# Altium PCB CNC.PcbDoc (part 3 of 3)
Units mm, origin at the board's own origin, x right, y up, seen from the top; angles counter-clockwise.
Board outline 148.41 x 98.24 mm, 4 copper layers (Top Layer, Mid-Layer 1, Ground Plane in NEGATIVE, Bottom Layer), stack 0.867 mm thick; 230 components, 218 nets, 997 pads, 307 vias.
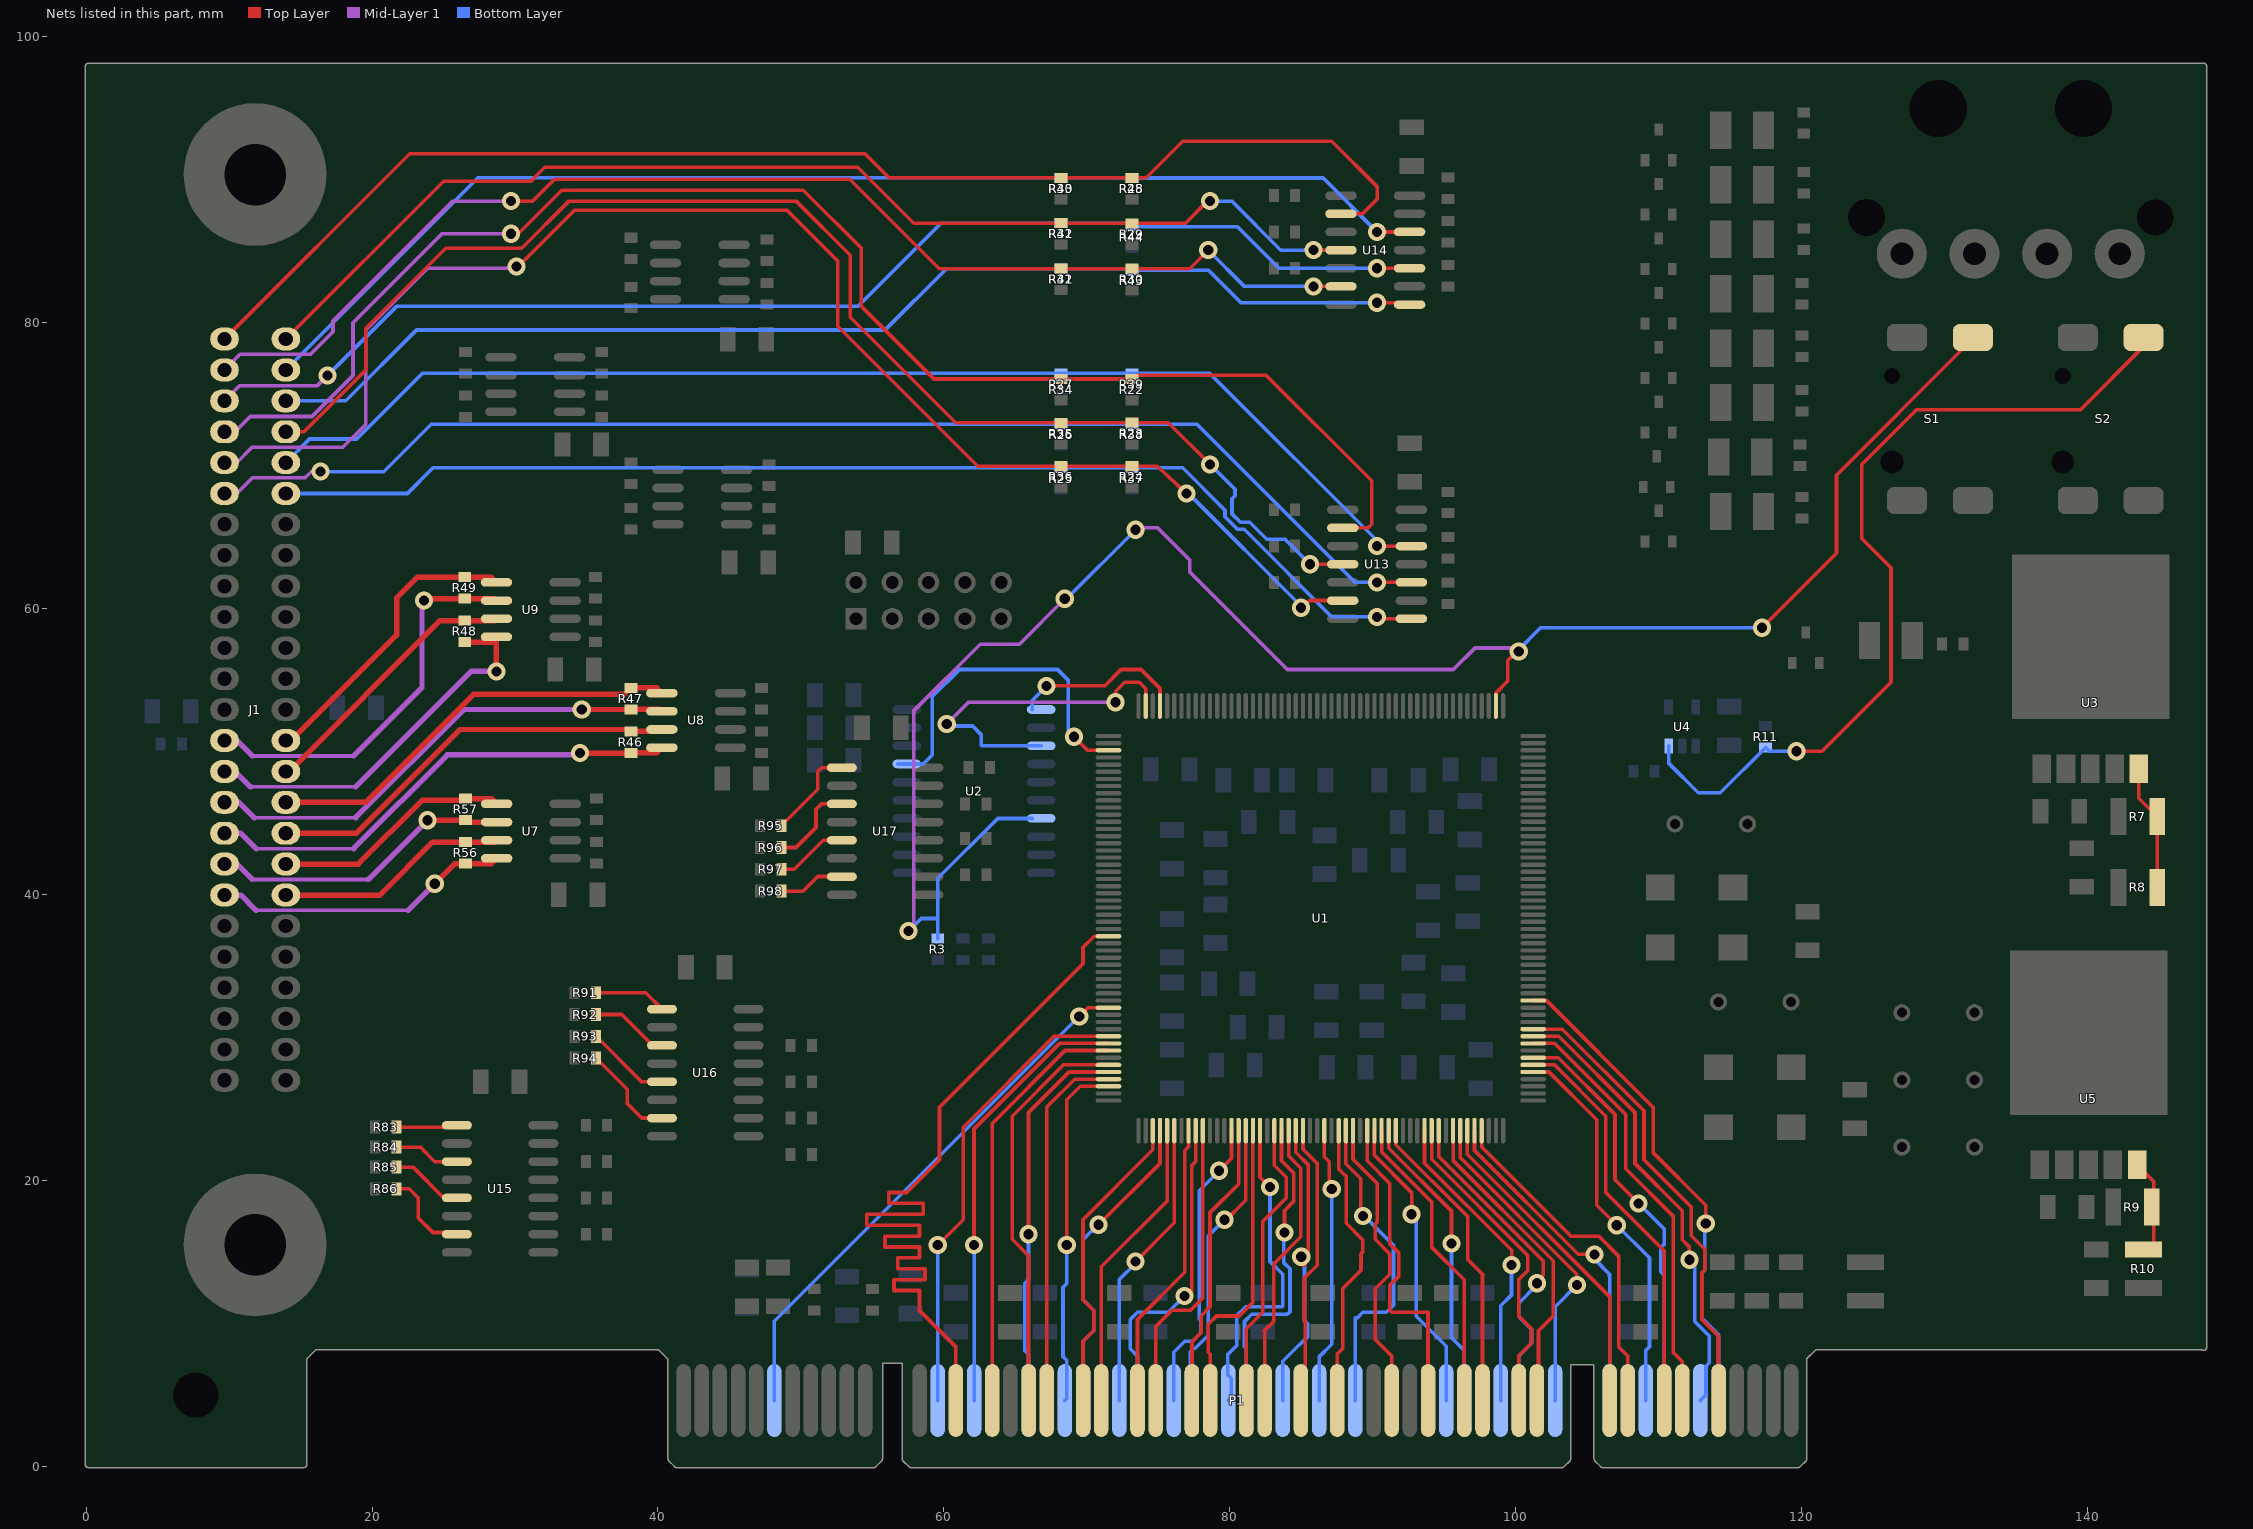
[diagram p5: the nets of this part, all layers, seen from the top]

## Via types
v1: diameter 1.27, hole 0.711, Top Layer to Bottom Layer, 303 vias
v2: diameter 2.032, hole 1.016, Top Layer to Bottom Layer, 3 vias
v3: diameter 1.27, hole 0.711, Top Layer to Bottom Layer, tented top, 1 vias

## Nets (pads, with @x,y where several pads share a name; then routed paths per layer and width w, separated by ;. In a path a pad name is that pad's centre, name@x,y a point inside that pad or via, vN(x,y) a via of type N, cw(c..) or ccw(c..) an arc to the next point about the centre after c; other vN are vias at no path point) (continued)
NetR3_1: R3.1 S1.2 U1.106 U2.7 | length 132.5
  Top Layer w0.254: v1(57.531,37.465) v1@57.531,37.973 ; U1.106@98.61,53.204 98.61,54.115 99.441,54.946 99.441,56.388 100.076,57.023 v1(100.203,57.023) ; v1(117.221,58.674) 122.428,63.881 122.428,69.342 131.303,78.217 S1.2@131.967,78.217
  Mid-Layer 1 w0.254: v1(57.531,37.465) 57.901,37.835 57.901,52.887 62.546,57.531 65.278,57.531 v1(68.453,60.706) ; v1(73.406,65.532) 73.533,65.659 74.952,65.659 77.203,63.408 77.203,62.562 84.012,55.753 95.631,55.753 97.142,57.264 99.962,57.264 v1(100.203,57.023)
  Bottom Layer w0.254: v1(57.531,37.465) 58.408,38.342 59.563,38.342 ; R3.1@59.563,36.945 59.563,38.342 ; U2.7@66.168,45.339 63.754,45.339 59.563,41.148 59.563,38.342 ; v1@68.453,60.579 v1(73.406,65.532) ; v1(100.203,57.023) 100.076,57.023 101.727,58.674 v1(117.221,58.674)
NetR7_2: R7.2 R8.1 U3.SENSE | length 8.8
  Top Layer w0.254: U3.SENSE@143.579,48.801 143.579,46.747 R7.2@144.86,45.466 R8.1@144.86,40.513
NetR9_2: R9.2 R10.1 U5.SENSE | length 6.5
  Top Layer w0.254: U5.SENSE@143.452,21.115 144.606,19.961 144.606,15.527 R10.1@144.272,15.193
NetR11_1: R11.1 S2.2 U4.3 | length 60.4
  Top Layer w0.254: v1(119.634,50.038) 121.412,50.038 126.238,54.864 126.238,62.865 124.206,64.897 124.206,70.104 128.016,73.914 139.474,73.914 143.905,78.345 S2.2@143.905,78.217
  Bottom Layer w0.254: U4.3@110.683,50.419 110.683,49.21 112.763,47.13 114.301,47.13 R11.1@117.475,50.304 117.741,50.038 v1(119.634,50.038)
NetR83_1: R83.1 U15.1 | length 4.3
  Top Layer w0.254: R83.1@21.705,23.749 25.804,23.749 U15.1@25.931,23.876
NetR84_1: R84.1 U15.3 | length 4.6
  Top Layer w0.254: R84.1@21.705,22.352 23.368,22.352 24.384,21.336 U15.3@25.931,21.336
NetR85_1: R85.1 U15.5 | length 5.1
  Top Layer w0.254: R85.1@21.705,20.955 22.86,20.955 25.019,18.796 U15.5@25.931,18.796
NetR86_1: R86.1 U15.7 | length 6.4
  Top Layer w0.254: R86.1@21.705,19.431 22.606,19.431 23.241,18.796 23.241,17.399 24.257,16.383 25.804,16.383 U15.7@25.931,16.256
NetR91_1: R91.1 U16.1 | length 5.1
  Top Layer w0.254: R91.1@35.675,33.147 39.139,33.147 U16.1@40.282,32.004
NetR92_1: R92.1 U16.3 | length 5.5
  Top Layer w0.254: R92.1@35.675,31.623 37.465,31.623 39.624,29.464 U16.3@40.282,29.464
NetR93_1: R93.1 U16.5 | length 5.9
  Top Layer w0.254: R93.1@35.675,30.099 38.85,26.924 U16.5@40.282,26.924
NetR94_1: R94.1 U16.7 | length 6.9
  Top Layer w0.254: R94.1@35.675,28.575 37.846,26.404 37.846,25.4 38.862,24.384 U16.7@40.282,24.384
NetR95_1: R95.1 U17.1 | length 6.6
  Top Layer w0.254: R95.1@48.629,44.831 51.181,47.383 51.181,48.641 51.435,48.895 U17.1@52.855,48.895
NetR96_1: R96.1 U17.3 | length 6.2
  Top Layer w0.254: R96.1@48.629,43.307 49.657,43.307 51.054,44.704 51.054,45.974 51.435,46.355 U17.3@52.855,46.355
NetR97_1: R97.1 U17.5 | length 5.1
  Top Layer w0.254: R97.1@48.629,41.783 49.53,41.783 51.562,43.815 U17.5@52.855,43.815
NetR98_1: R98.1 U17.7 | length 4.6
  Top Layer w0.254: R98.1@48.641,40.259 50.165,40.259 51.181,41.275 U17.7@52.855,41.275
NetU1_153: U1.153 U2.1 | length 12.2
  Top Layer w0.254: v1(67.183,54.61) 71.247,54.61 72.39,55.753 73.787,55.753 75.11,54.43 U1.153@75.11,53.204
  Bottom Layer w0.254: U2.1@66.168,52.959 66.168,53.595 v1(67.183,54.61)
NetU1_155: U1.155 U2.3 | length 24.7
  Top Layer w0.254: v1(72.009,53.467) 72.009,54.229 72.644,54.864 73.66,54.864 74.11,54.414 U1.155@74.11,53.204
  Mid-Layer 1 w0.254: v1(60.198,51.943) 61.722,53.467 v1(72.009,53.467)
  Bottom Layer w0.254: v1(60.198,51.943) 60.198,51.816 60.211,51.803 62.011,51.803 62.598,51.216 62.598,50.472 62.651,50.419 U2.3@66.803,50.419
NetU1_159: U1.159 U2.17 | length 24.3
  Top Layer w0.254: v1(69.088,51.054) 70.038,50.104 U1.159@71.51,50.104
  Bottom Layer w0.254: U2.17@56.768,49.149 U2.17@57.403,49.149 58.547,49.149 59.182,49.784 59.182,53.848 61.087,55.753 67.945,55.753 68.707,54.991 68.707,51.435 v1(69.088,51.054)
OUT1: J1.47 R22.1 R34.2 U13.2 | length 105.6
  Top Layer w0.254: v1(29.718,86.233) 30.226,86.233 33.274,89.281 50.165,89.281 54.229,85.217 54.229,81.153 59.309,76.073 R34.2@68.199,76.073 R22.1@73.152,76.073 73.406,76.327 82.55,76.327 89.916,68.961 89.916,65.913 89.662,65.659 U13.2@87.897,65.659
  Mid-Layer 1 w0.254: J1.47@9.677,72.387 10.411,72.387 11.481,73.457 15.799,73.457 18.669,76.327 18.669,80.01 24.892,86.233 v1(29.718,86.233)
OUT2: J1.4 R23.1 R35.2 U13.4 | length 96.9
  Top Layer w0.254: J1.4@13.97,72.387 15.237,72.387 19.558,76.708 19.558,79.629 25.146,85.217 30.48,85.217 33.782,88.519 49.657,88.519 53.443,84.733 53.443,80.391 60.821,73.013 R35.2@68.199,73.013 68.211,73.025 R23.1@73.152,73.025 75.692,73.025 v1(78.613,70.104) ; v1(85.598,63.119) U13.4@87.897,63.119 U13.4@88.024,63.246
  Bottom Layer w0.254: v1(78.613,70.104) 80.359,68.358 80.359,67.913 80.15,67.704 80.15,66.64 80.737,66.053 81.394,66.053 82.582,64.865 83.852,64.865 v1(85.598,63.119)
OUT3: J1.46 R24.1 R36.2 U13.6 | length 103.8
  Top Layer w0.254: v1(30.099,83.947) 30.226,83.947 34.163,87.884 49.022,87.884 52.578,84.328 52.578,79.756 62.357,69.977 R36.2@68.199,69.977 R24.1@73.152,69.977 74.93,69.977 v1(76.962,68.072) ; v1(84.963,60.071) 85.598,60.579 U13.6@87.897,60.579
  Mid-Layer 1 w0.254: J1.46@9.677,70.227 10.537,70.227 11.608,71.298 17.958,71.298 19.558,72.898 19.558,79.502 23.876,83.82 29.972,83.82 v1(30.099,83.947)
  Bottom Layer w0.254: v1(76.962,68.072) 77.111,68.072 84.963,60.22 v1(84.963,60.071)
OUT4: J1.6 R25.1 R37.2 U13.8 | length 84.1
  Top Layer w0.254: v1(90.297,59.436) 90.424,59.436 90.551,59.309 U13.8@92.697,59.309
  Bottom Layer w0.254: J1.6@13.97,68.067 22.474,68.067 24.269,69.862 R37.2@73.152,69.862 76.696,69.862 79.654,66.904 79.654,66.435 80.532,65.557 81.001,65.557 87.122,59.436 v1(90.297,59.436)
OUT5: J1.45 R26.1 R38.2 U13.10 | length 89.6
  Top Layer w0.254: v1@90.424,61.849 U13.10@92.697,61.849
  Mid-Layer 1 w0.254: J1.45@9.677,68.067 10.536,68.067 11.633,69.164 15.316,69.164 15.748,69.596 v1(16.383,69.596)
  Bottom Layer w0.254: v1(16.383,69.596) 20.828,69.596 24.142,72.91 R26.1@68.199,72.91 R38.2@73.152,72.91 73.164,72.898 77.724,72.898 88.773,61.849 v1(90.297,61.849) v1@90.424,61.849
OUT6: J1.5 R27.1 R39.2 U13.12 | length 86.5
  Top Layer w0.254: v1(90.297,64.389) U13.12@92.697,64.389
  Bottom Layer w0.254: J1.5@13.97,70.227 15.625,71.882 18.923,71.882 23.507,76.466 R27.1@68.199,76.466 R39.2@73.152,76.466 78.601,76.466 v1@90.551,64.516
OUT7: J1.50 R28.1 R40.2 U14.2 | length 92.9
  Top Layer w0.254: J1.50@9.677,78.867 22.631,91.821 54.483,91.821 56.158,90.146 R40.2@68.199,90.146 R28.1@73.152,90.146 74.144,90.146 76.708,92.71 87.122,92.71 90.297,89.535 90.297,88.646 89.281,87.63 U14.2@87.77,87.63
OUT8: J1.1 R29.1 R41.2 U14.4 | length 82.5
  Top Layer w0.254: J1.1@13.97,78.867 25.019,89.916 31.115,89.916 32.083,90.884 53.975,90.884 57.888,86.971 R41.2@68.199,86.971 73.14,86.971 R29.1@73.152,86.959 76.871,86.959 78.431,88.519 v1(78.613,88.519) ; v1(85.852,85.09) U14.4@87.77,85.09
  Bottom Layer w0.254: v1(78.613,88.519) 80.137,88.519 83.566,85.09 v1(85.852,85.09)
OUT9: J1.49 R30.1 R42.2 U14.6 | length 88.2
  Top Layer w0.254: v1(29.718,88.519) 31.242,88.519 32.766,90.043 53.419,90.043 59.666,83.796 R42.2@68.199,83.796 R30.1@73.152,83.796 77.192,83.796 v1(78.486,85.09) ; v1(85.852,82.55) U14.6@87.77,82.55
  Mid-Layer 1 w0.254: J1.49@9.677,76.707 10.771,77.8 15.697,77.8 17.272,79.375 17.272,80.137 25.654,88.519 v1(29.718,88.519)
  Bottom Layer w0.254: v1(78.486,85.09) 81.026,82.55 v1(85.852,82.55)
OUT10: J1.3 R31.1 R43.2 U14.8 | length 83.6
  Top Layer w0.254: v1(90.297,81.407) 92.443,81.407 U14.8@92.57,81.28 U14.8@92.456,81.166
  Bottom Layer w0.254: J1.3@13.97,74.547 18.159,74.547 23.114,79.502 55.88,79.502 60.174,83.796 R31.1@68.199,83.796 73.14,83.796 R43.2@73.152,83.784 ; R43.2@73.152,83.681 78.498,83.681 80.772,81.407 v1(90.297,81.407)
OUT11: J1.48 R32.1 R44.2 U14.10 | length 89.2
  Top Layer w0.254: v1(90.297,83.82) U14.10@92.57,83.82
  Mid-Layer 1 w0.254: J1.48@9.677,74.547 10.746,75.616 16.18,75.616 v1(16.891,76.327)
  Bottom Layer w0.254: v1(16.891,76.327) 21.717,81.153 53.975,81.153 59.793,86.971 R32.1@68.199,86.971 R44.2@73.152,86.971 ; R44.2@73.152,86.729 80.53,86.729 83.439,83.82 v1(90.297,83.82)
OUT12: J1.2 R33.1 R45.2 U14.12 | length 85.7
  Top Layer w0.254: v1(90.297,86.36) U14.12@92.57,86.36
  Bottom Layer w0.254: J1.2@13.97,76.707 27.409,90.146 R33.1@68.199,90.146 73.14,90.146 R45.2@73.152,90.134 86.523,90.134 v1(90.297,86.36)
PCI_AD0: P1.A58 U1.67 | length 34.3
  Top Layer w0.254: U1.67@101.21,32.604 102.143,32.604 109.601,25.146 109.601,21.971 113.284,18.288 v1(113.284,17.018)
  Bottom Layer w0.254: v1(113.284,17.018) 113.284,16.916 113.209,16.992 113.209,13.746 113.017,13.554 113.017,10.365 114.179,9.204 P1.A58@114.179,4.628
PCI_AD1: P1.B58 U1.63 | length 32.7
  Top Layer w0.254: U1.63@101.21,30.604 103.254,30.604 108.966,24.892 108.966,21.463 112.268,18.161 112.268,16.151 113.209,15.21 113.209,13.746 113.017,13.554 113.017,10.274 114.179,9.113 P1.B58@114.179,4.628
PCI_AD2: P1.A57 U1.62 | length 32.4
  Top Layer w0.254: U1.62@101.21,30.104 102.992,30.104 108.331,24.765 108.331,21.209 111.633,17.907 111.633,15.875 112.141,15.367 v1(112.141,14.478) v1@112.522,14.097
  Bottom Layer w0.254: v1(112.141,14.478) 112.522,14.097 112.522,10.16 113.538,9.144 113.538,7.259 113.302,7.023 113.302,5.022 P1.A57@112.909,4.628
PCI_AD3: P1.B56 U1.61 | length 30.2
  Top Layer w0.254: U1.61@101.21,29.604 102.73,29.604 107.696,24.638 107.696,20.828 110.998,17.526 110.998,8.001 111.639,7.36 P1.B56@111.639,4.628
PCI_AD4: P1.A55 U1.59 | length 29
  Top Layer w0.254: U1.59@101.21,28.604 102.968,28.604 106.934,24.638 106.934,20.066 v1(108.585,18.415)
  Bottom Layer w0.254: v1(108.585,18.415) 110.369,16.631 110.369,15.543 110.134,15.309 110.134,13.647 110.369,13.413 P1.A55@110.369,4.628
PCI_AD5: P1.B55 U1.58 | length 28.1
  Top Layer w0.254: U1.58@101.21,28.104 102.706,28.104 106.299,24.511 106.299,19.177 110.369,15.107 P1.B55@110.369,4.628
PCI_AD6: P1.A54 U1.57 | length 27.1
  Top Layer w0.254: U1.57@101.21,27.604 102.317,27.604 105.664,24.257 105.664,18.288 v1(107.061,16.891)
  Bottom Layer w0.254: v1(107.061,16.891) 109.347,14.605 109.347,8.382 109.099,8.134 P1.A54@109.099,4.628
PCI_AD7: P1.B53 U1.49 | length 24.3
  Top Layer w0.254: U1.49@97.61,23.504 97.61,22.354 103.835,16.129 105.791,16.129 107.188,14.732 107.188,8.382 107.829,7.741 P1.B53@107.829,4.628
PCI_AD8: P1.B52 U1.47 | length 23
  Top Layer w0.254: U1.47@96.61,23.504 96.61,21.856 106.559,11.907 P1.B52@106.559,4.628
PCI_AD9: P1.A49 U1.46 | length 22.9
  Top Layer w0.254: U1.46@96.11,23.504 96.11,21.619 104.267,13.462 v1(104.267,12.7)
  Bottom Layer w0.254: P1.A49@102.749,4.628 102.749,11.182 v1(104.267,12.7)
PCI_AD10: P1.B48 U1.45 | length 22.2
  Top Layer w0.254: U1.45@95.61,23.504 95.61,21.408 102.616,14.402 102.616,10.541 101.587,9.512 101.587,4.737 P1.B48@101.479,4.628
PCI_AD11: P1.A47 U1.43 | length 24.1
  Top Layer w0.254: U1.43@94.61,23.504 94.61,21.697 101.918,14.389 101.918,13.399 101.219,12.7 101.346,12.573 101.473,12.7 v1(101.473,12.827)
  Bottom Layer w0.254: P1.A47@100.209,4.628 100.209,7.741 100.203,7.747 101.092,8.636 101.092,9.62 100.203,10.509 100.203,11.43 101.473,12.7 v1(101.473,12.827)
PCI_AD12: P1.B47 U1.42 | length 22.7
  Top Layer w0.254: U1.42@94.11,23.504 94.11,21.496 100.838,14.768 100.838,13.716 100.209,13.087 100.209,10.535 101.092,9.652 101.092,8.636 100.209,7.753 P1.B47@100.209,4.628
PCI_AD13: P1.A46 U1.41 | length 21.7
  Top Layer w0.254: U1.41@93.61,23.504 93.61,21.223 99.706,15.127 99.706,14.108 v1(99.695,14.097)
  Bottom Layer w0.254: P1.A46@98.939,4.628 98.939,11.258 99.695,12.014 v1(99.695,14.097)
PCI_AD14: P1.B45 U1.37 | length 21.4
  Top Layer w0.254: U1.37@91.61,23.504 91.61,22.523 96.647,17.486 96.647,14.478 97.669,13.456 P1.B45@97.669,4.628
PCI_AD15: P1.A44 U1.36 | length 21.1
  Top Layer w0.254: U1.36@91.11,23.504 91.11,22.276 95.504,17.882 v1(95.504,15.621)
  Bottom Layer w0.254: v1(95.504,15.621) 95.504,9.017 96.399,8.122 P1.A44@96.399,4.628
PCI_AD16: P1.A32 U1.21 | length 22.5
  Top Layer w0.254: U1.21@83.61,23.504 83.61,21.394 84.455,20.549 84.455,18.542 83.82,17.907 v1(83.82,16.383)
  Bottom Layer w0.254: P1.A32@81.159,4.628 81.153,4.634 81.153,8.255 81.026,8.382 81.026,10.16 81.534,10.668 84.023,10.668 84.201,10.846 84.201,13.843 83.757,14.287 83.757,16.319 v1(83.82,16.383)
PCI_AD17: P1.B32 U1.20 | length 20.4
  Top Layer w0.254: P1.B32@81.159,4.628 81.153,4.634 81.153,9.652 82.296,10.795 82.296,17.145 83.947,18.796 83.947,20.244 83.11,21.081 U1.20@83.11,23.504
PCI_AD18: P1.A31 U1.18 | length 22.8
  Top Layer w0.254: U1.18@82.11,23.504 82.11,20.252 v1(82.804,19.558)
  Bottom Layer w0.254: P1.A31@79.889,4.628 80.086,4.826 80.086,6.179 79.858,6.407 79.858,7.849 80.467,8.458 80.467,10.541 81.102,11.176 83.642,11.176 83.693,11.227 83.693,13.462 82.804,14.351 v1(82.804,19.558)
PCI_AD19: P1.B30 U1.17 | length 21.2
  Top Layer w0.254: P1.B30@78.619,4.628 78.619,7.868 78.486,8.001 78.486,9.969 79.058,10.541 80.645,10.541 81.61,11.506 U1.17@81.61,23.504
PCI_AD20: P1.A29 U1.16 | length 20.8
  Top Layer w0.254: v1(79.629,17.272) 79.629,17.145 81.11,18.626 U1.16@81.11,23.504
  Bottom Layer w0.254: P1.A29@77.349,4.628 77.216,4.761 77.216,8.001 77.495,8.28 77.583,8.28 78.486,9.184 78.486,16.129 v1(79.629,17.272)
PCI_AD21: P1.B29 U1.15 | length 20.2
  Top Layer w0.254: P1.B29@77.349,4.628 77.349,8.747 77.991,9.389 77.991,10.554 78.613,11.176 78.613,17.78 80.61,19.777 U1.15@80.61,23.504
PCI_AD22: P1.A28 U1.14 | length 21
  Top Layer w0.254: v1(79.248,20.701) 80.11,21.563 U1.14@80.11,23.504
  Bottom Layer w0.254: P1.A28@76.079,4.628 76.079,7.995 76.073,8.001 76.848,8.776 77.378,8.776 77.965,9.363 77.965,10.195 77.851,10.309 77.851,19.304 v1(79.248,20.701)
PCI_AD23: P1.B27 U1.10 | length 21
  Top Layer w0.254: P1.B27@74.809,4.628 74.803,4.634 74.803,9.779 75.959,10.935 77.251,10.935 78.11,11.794 U1.10@78.11,23.504
PCI_AD24: P1.A25 U1.6 | length 20.5
  Top Layer w0.254: v1(73.406,14.351) 76.11,17.055 U1.6@76.11,23.504
  Bottom Layer w0.254: P1.A25@72.269,4.628 72.269,13.087 73.406,14.224 v1(73.406,14.351)
PCI_AD25: P1.B24 U1.5 | length 20.8
  Top Layer w0.254: P1.B24@70.999,4.628 70.999,13.976 75.61,18.587 U1.5@75.61,23.504
PCI_AD26: P1.A23 U1.4 | length 22
  Top Layer w0.254: v1(70.815,16.916) 75.11,21.211 U1.4@75.11,23.504
  Bottom Layer w0.254: P1.A23@69.729,4.628 69.729,8.769 70.472,9.512 70.472,10.935 69.729,11.678 69.729,15.881 70.307,16.459 70.79,16.459 70.815,16.485 v1(70.815,16.916)
PCI_AD27: P1.B23 U1.3 | length 21.5
  Top Layer w0.254: 69.723,17.272 74.61,22.159 U1.3@74.61,23.504 ; P1.B23@69.729,4.628 69.729,8.769 70.485,9.525 70.485,10.922 69.729,11.678 69.729,17.266
PCI_AD28: P1.A22 U1.206 | length 24.6
  Top Layer w0.254: v1(68.585,15.499) 68.585,25.659 69.53,26.604 U1.206@71.51,26.604
  Bottom Layer w0.254: P1.A22@68.459,4.628 68.585,4.755 68.585,7.441 68.326,7.7 68.326,12.554 68.585,12.813 v1(68.585,15.499)
PCI_AD29: P1.B21 U1.205 | length 25.7
  Top Layer w0.254: P1.B21@67.189,4.628 67.189,25.152 69.141,27.104 U1.205@71.51,27.104
PCI_AD30: P1.A20 U1.204 | length 27.1
  Top Layer w0.254: v1(65.913,16.256) 65.913,24.765 68.752,27.604 U1.204@71.51,27.604
  Bottom Layer w0.254: v1(65.913,16.256) 65.913,15.494 65.919,15.488 65.919,13.087 65.659,12.827 65.659,8.128 65.919,7.868 P1.A20@65.919,4.628
PCI_AD31: P1.B20 U1.203 | length 28.6
  Top Layer w0.254: P1.B20@65.919,4.628 65.919,14.748 64.77,15.897 64.77,24.511 68.363,28.104 U1.203@71.51,28.104
PCI_CBE0: P1.A52 U1.48 | length 23.5
  Top Layer w0.254: U1.48@97.11,23.504 97.11,22.118 104.369,14.859 105.537,14.859 v1(105.512,14.834)
  Bottom Layer w0.254: v1(105.512,14.834) 105.537,14.859 105.537,14.484 106.553,13.468 106.553,13.335 106.559,13.329 P1.A52@106.559,4.628
PCI_CBE1: P1.B44 U1.35 | length 21.3
  Top Layer w0.254: U1.35@90.61,23.504 90.61,22.03 94.107,18.533 94.107,15.367 96.399,13.075 P1.B44@96.399,4.628
PCI_CBE2: P1.B33 U1.22 | length 20.3
  Top Layer w0.254: P1.B33@82.429,4.628 82.429,9.519 82.423,9.525 83.058,10.16 83.058,14.17 84.963,16.075 84.963,20.879 84.11,21.732 U1.22@84.11,23.504
PCI_CBE3: P1.B26 U1.8 | length 20.4
  Top Layer w0.254: P1.B26@73.539,4.628 73.539,10.293 76.835,13.589 76.835,22.098 77.11,22.373 U1.8@77.11,23.504
PCI_CLK: P1.B16 U1.185 | length 63.5
  Top Layer w0.254: P1.B16@60.839,4.628 60.839,8.376 58.293,10.922 58.293,12.319 56.506,12.319 56.506,13.081 58.674,13.081 58.674,13.843 56.769,13.843 56.769,14.605 58.293,14.605 58.293,15.367 55.88,15.367 55.88,16.129 58.293,16.129 58.293,16.891 54.61,16.891 54.61,17.653 58.547,17.653 58.547,18.415 56.134,18.415 56.134,19.177 57.404,19.177 59.69,21.463 59.69,25.146 69.723,35.179 69.723,36.322 70.505,37.104 U1.185@71.51,37.104
PCI_DEVSEL: P1.B37 U1.29 | length 20.3
  Top Layer w0.254: P1.B37@87.509,4.628 87.509,7.88 87.884,8.255 87.884,12.446 89.167,13.729 89.167,14.894 89.281,15.008 89.281,15.875 88.138,17.018 88.138,20.32 88.006,20.427 87.742,20.691 87.61,20.848 U1.29@87.61,23.504
PCI_FRAME: P1.A34 U1.23 | length 22
  Top Layer w0.254: U1.23@84.61,23.504 84.61,21.994 85.471,21.133 85.471,14.732 85.09,14.351 85.09,14.783 85.039,14.783 84.988,14.732 v1(84.988,14.681) ; v1@85.09,14.097 v1@85.217,14.097
  Bottom Layer w0.254: P1.A34@83.699,4.628 83.693,4.634 83.693,7.366 84.849,8.522 84.871,8.522 85.458,9.109 85.458,9.941 85.217,10.182 85.217,14.961 84.988,14.732 v1(84.988,14.681)
PCI_GNT: P1.A17 U1.200 | length 30.9
  Top Layer w0.254: v1(62.103,15.494) 62.103,23.622 68.085,29.604 U1.200@71.51,29.604
  Bottom Layer w0.254: v1(62.103,15.494) 62.109,15.488 P1.A17@62.109,4.628
PCI_IDSEL: P1.A26 U1.9 | length 22.3
  Top Layer w0.254: v1@76.968,11.805 77.343,12.179 77.343,21.082 77.61,21.349 U1.9@77.61,23.504
  Bottom Layer w0.254: P1.A26@73.539,4.628 73.539,7.741 73.025,8.255 73.025,10.287 73.533,10.795 75.692,10.795 v1(76.835,11.938)
PCI_INTA: P1.A6 U1.195 | length 38
  Top Layer w0.254: v1(69.469,31.496) 70.077,32.104 U1.195@71.51,32.104
  Bottom Layer w0.254: P1.A6@48.139,4.628 48.139,10.166 v1(69.469,31.496)
PCI_IRDY: P1.B35 U1.24 | length 19.8
  Top Layer w0.254: P1.B35@84.969,4.628 85.269,4.928 85.269,10.13 85.217,10.182 85.217,13.208 86.106,14.097 86.106,21.209 85.11,22.205 U1.24@85.11,23.504
PCI_PAR: P1.A43 U1.34 | length 21.5
  Top Layer w0.254: U1.34@90.11,23.504 90.11,21.777 92.71,19.177 v1(92.71,17.653)
  Bottom Layer w0.254: v1@92.71,18.161 v1(92.71,17.653) 93.04,17.323 93.04,10.516 95.129,8.427 P1.A43@95.129,4.628
PCI_PERR: P1.B40 U1.31 | length 21
  Top Layer w0.254: U1.31@88.61,23.504 88.61,21.499 90.31,19.799 90.31,17.11 90.17,16.971 90.17,15.897 91.186,14.881 91.186,13.462 90.17,12.446 90.17,8.89 91.313,7.747 91.313,4.634 P1.B40@91.319,4.628
PCI_REQ: P1.B18 U1.201 | length 29.6
  Top Layer w0.254: P1.B18@63.379,4.628 63.379,24.009 68.474,29.104 U1.201@71.51,29.104
PCI_RST: P1.A15 U1.199 | length 32.7
  Top Layer w0.254: v1(59.563,15.494) 61.341,17.272 61.341,23.749 67.696,30.104 U1.199@71.51,30.104
  Bottom Layer w0.254: v1(59.563,15.494) 59.563,4.634 P1.A15@59.569,4.628
PCI_SERR: P1.B42 U1.33 | length 22.6
  Top Layer w0.254: U1.33@89.61,23.504 89.61,21.388 91.186,19.812 91.186,15.581 91.821,14.946 91.821,13.335 91.186,12.7 91.186,10.922 91.313,10.795 93.853,10.795 93.853,10.541 93.859,10.535 P1.B42@93.859,4.628
PCI_STOP: P1.A38 U1.30 | length 22.6
  Top Layer w0.254: U1.30@88.11,23.504 88.11,21.186 89.154,20.142 89.154,17.678 v1(89.306,17.526)
  Bottom Layer w0.254: P1.A38@88.779,4.628 88.779,7.868 88.76,7.887 88.76,10.401 88.786,10.427 88.935,10.427 89.303,10.795 90.932,10.795 91.44,11.303 91.44,15.494 89.306,17.628 v1(89.306,17.526)
PCI_TRDY: P1.A36 U1.27 | length 19.7
  Top Layer w0.254: U1.27@86.61,23.504 86.61,21.67 86.944,21.336 86.944,19.609 v1(87.122,19.431)
  Bottom Layer w0.254: P1.A36@86.239,4.628 86.239,7.669 87.122,8.553 v1(87.122,19.431) v1@87.122,19.685
XD_N: J1.19 R56.2 U7.7 | length 16.3
  Top Layer w0.381: J1.19@13.97,39.98 20.549,39.98 24.245,43.676 R56.2@26.543,43.676 28.576,43.676 U7.7@28.715,43.815
XD_P: J1.32 R56.1 U7.8 | length 21
  Top Layer w0.381: v1(24.384,40.767) 25.793,42.176 R56.1@26.543,42.176 28.346,42.176 U7.8@28.715,42.545
  Mid-Layer 1 w0.254: 11.887,38.913 22.53,38.913
  Mid-Layer 1 w0.381: J1.32@9.677,39.98 10.82,39.98 11.887,38.913 ; 22.53,38.913 v1(24.384,40.767)
XP_N: J1.18 R57.2 U7.5 | length 16.8
  Top Layer w0.381: J1.18@13.97,42.147 19.033,42.147 23.495,46.609 26.428,46.609 R57.2@26.543,46.724 28.346,46.724 U7.5@28.715,46.355
XP_P: J1.33 R57.1 U7.6 | length 21.3
  Top Layer w0.381: v1(23.876,45.212) 23.888,45.224 R57.1@26.543,45.224 26.682,45.085 U7.6@28.715,45.085
  Mid-Layer 1 w0.254: 11.633,41.072 19.736,41.072
  Mid-Layer 1 w0.381: J1.33@9.677,42.147 10.558,42.147 11.633,41.072 ; 19.736,41.072 v1(23.876,45.212)
YD_N: J1.17 R46.2 U8.7 | length 29.4
  Top Layer w0.381: J1.17@13.97,44.307 18.907,44.307 26.162,51.562 37.961,51.562 R46.2@38.1,51.423 40.133,51.423 U8.7@40.272,51.562
YD_P: J1.34 R46.1 U8.8 | length 34
  Top Layer w0.381: v1(34.544,49.911) 38.088,49.911 R46.1@38.1,49.923 39.903,49.923 U8.8@40.272,50.292
  Mid-Layer 1 w0.254: 11.887,43.231 18.72,43.231
  Mid-Layer 1 w0.381: J1.34@9.677,44.307 10.811,44.307 11.887,43.231 ; 18.72,43.231 25.273,49.784 34.417,49.784 v1(34.544,49.911)
YP_N: J1.16 R47.2 U8.5 | length 29.8
  Top Layer w0.381: J1.16@13.97,46.467 19.543,46.467 27.114,54.038 37.667,54.038 R47.2@38.1,54.471 39.903,54.471 U8.5@40.272,54.102
YP_P: J1.35 R47.1 U8.6 | length 34.2
  Top Layer w0.381: v1(34.671,52.959) 38.088,52.959 R47.1@38.1,52.971 40.133,52.971 U8.6@40.272,52.832
  Mid-Layer 1 w0.254: 11.76,45.39 18.847,45.39
  Mid-Layer 1 w0.381: J1.35@9.677,46.467 10.683,46.467 11.76,45.39 ; 18.847,45.39 26.416,52.959 v1(34.671,52.959)
ZD_N: J1.15 R48.2 U9.7 | length 19.2
  Top Layer w0.381: J1.15@13.97,48.627 14.21,48.627 24.765,59.182 26.471,59.182 R48.2@26.483,59.17 28.563,59.17 U9.7@28.702,59.309
ZD_P: J1.36 R48.1 U9.8 | length 27.6
  Top Layer w0.381: R48.1@26.483,57.67 28.333,57.67 U9.8@28.702,58.039 v1(28.702,55.626)
  Mid-Layer 1 w0.254: 11.506,47.549 18.847,47.549
  Mid-Layer 1 w0.381: J1.36@9.677,48.627 10.428,48.627 11.506,47.549 ; 18.847,47.549 26.924,55.626 v1(28.702,55.626)
ZP_N: J1.14 R49.2 U9.5 | length 21.1
  Top Layer w0.381: J1.14@13.97,50.787 14.338,50.787 21.717,58.166 21.717,60.772 23.163,62.218 R49.2@26.483,62.218 28.333,62.218 U9.5@28.702,61.849
ZP_P: J1.37 R49.1 U9.6 | length 27.6
  Top Layer w0.381: v1(23.622,60.579) 23.761,60.718 R49.1@26.483,60.718 28.563,60.718 U9.6@28.702,60.579
  Mid-Layer 1 w0.254: 11.633,49.708 18.72,49.708
  Mid-Layer 1 w0.381: J1.37@9.677,50.787 10.554,50.787 11.633,49.708 ; 18.72,49.708 23.495,54.483 23.495,60.452 v1(23.622,60.579)
pads on no net: J2.0 J2.1 P1.A1 P1.A2 P1.A3 P1.A7 P1.A9 P1.A11 P1.A14 P1.A19 P1.A40 P1.A41 P1.A60 P1.B1 P1.B2 P1.B7 P1.B8 P1.B10 P1.B14 P1.B39 P1.B60 S1. S1.1 S2. S2.1 U1.7 U1.44 U1.55 U1.56 U1.60 U1.68 U1.69 U1.70 U1.71 U1.73 U1.74 U1.75 U1.81 U1.82 U1.83 U1.84 U1.99 U1.101 U1.108 U1.110 U1.112 U1.114 U1.120 U1.122 U1.125 U1.127 U1.132 U1.133 U1.134 U1.135 U1.136 U1.139 U1.141 U1.146 U1.148 U1.150 U1.152 U1.154 U1.182 U1.187 U1.188 U1.189 U1.191 U1.192 U1.193 U1.194 U1.202 U2.2 U2.9 U2.12 U2.13 U2.14 U2.15 U2.16 U4.4

## Polygon pours and split planes (outlines as drawn)
5V on Top Layer "Mid-Layer 1-No Net" (solid, pour order 31): 45.339,11.049 45.466,11.176 49.149,11.176 49.149,9.779 48.895,9.398 48.895,7.493 46.355,7.493 45.339,8.509
GND on Top Layer "Mid-Layer 1-No Net" (solid, pour order 37): 131.445,25.654 131.445,21.59 131.572,21.463 131.699,21.336 132.08,21.336 133.35,21.336 133.477,21.463 134.239,22.225 134.239,24.003 135.255,25.019 135.255,25.654
GND on Top Layer "Mid-Layer 1-No Net" (solid, pour order 36): 145.923,38.227 139.446,38.227 138.557,37.338 138.557,36.576 138.176,36.195 138.176,36.068 132.461,36.068 131.445,35.052 131.445,25.654 132.842,24.257 145.923,24.257
5V on Top Layer "Mid-Layer 1-No Net" (solid, pour order 32): 139.192,49.911 139.192,46.863 138.811,46.863 137.922,45.974 137.922,43.688 135.636,43.688 131.064,39.116 131.064,18.923 133.604,18.923 128.27,13.589 128.27,44.831 133.604,49.911
3V3 on Top Layer "Mid-Layer 1-No Net" (solid, pour order 29): 141.224,49.784 141.224,45.466 140.081,44.323 138.938,44.323 138.176,43.688 136.017,43.688 132.842,40.513 132.842,36.576 137.795,36.576 138.049,36.83 138.049,41.148 138.684,41.783 140.589,41.783 141.097,42.291 141.097,43.307 141.986,44.196 143.002,44.196 143.002,46.863 142.494,47.371 142.494,49.784
2V5 on Top Layer "Mid-Layer 1-No Net" (solid, remove dead copper, pour order 26): 141.097,22.098 141.097,17.145 137.795,17.145 135.89,15.367 135.89,9.906 136.017,10.033 139.192,10.033 139.192,13.335 139.827,13.97 141.732,13.97 142.494,14.732 142.494,20.066 142.367,20.193 142.367,22.098
5V on Top Layer "Mid-Layer 1-No Net" (solid, pour order 25): 117.475,7.366 117.475,7.874 115.951,9.398 115.951,12.319 126.238,12.319 126.365,12.192 135.255,21.082 135.255,22.987 135.382,23.114 139.446,23.114 139.446,18.796 135.636,14.986 135.636,11.994 133.477,9.835 120.021,9.835 120.015,8.001 119.761,7.366
GND on Top Layer "Mid-Layer 1-No Net" (solid, pour order 33): 145.923,68.834 125.349,68.834 125.349,64.643 128.397,61.595 131.826,61.595 131.826,61.468 132.588,60.706 132.588,51.943 133.35,51.181 145.923,51.181
GND on Top Layer "Mid-Layer 1-No Net" (solid, remove dead copper, pour order 53): 93.472,13.716 92.456,12.7 92.583,12.573 92.583,11.938 95.504,11.938 95.504,13.081 94.742,13.843
5V on Bottom Layer "Mid-Layer 1-No Net" (solid, remove dead copper, pour order 48): 22.631,49.759 22.581,49.759 20.676,51.664 19.406,51.664 18.542,52.451 18.542,53.797 15.545,53.797 15.113,53.365 15.113,52.349 15.443,52.349 17.043,50.749 17.043,47.193 18.669,45.212
3V3 on Bottom Layer "Mid-Layer 1-No Net" (solid, remove dead copper, pour order 35): 72.39,52.832 72.519,52.698 99.949,52.698 99.949,24.13 99.82,24.264 72.39,24.264
3V3 on Bottom Layer "Mid-Layer 1-No Net" (solid, pour order 30): 132.842,40.513 132.842,36.576 137.795,36.576 137.922,36.703 138.049,36.83 138.049,40.513
5V on Bottom Layer "Mid-Layer 1-No Net" (solid, pour order 28): 116.586,11.049 119.634,11.049 119.634,7.493 117.602,7.493 116.586,8.509 116.586,9.017
5V on Bottom Layer "Mid-Layer 1-No Net" (solid, remove dead copper, pour order 41): 50.8,12.827 49.149,10.668 49.149,8.255 49.911,7.493 51.181,7.493 51.562,7.874 53.848,9.906 58.928,9.906 58.928,12.827
GND on Bottom Layer "Mid-Layer 1-No Net" (solid, remove dead copper, pour order 51): 52.324,12.7 58.852,12.7 58.928,12.624 58.928,14.097 58.928,14.224 57.023,16.129 53.848,16.129 53.594,16.129 52.07,14.605 52.07,12.7
5V on Bottom Layer "Mid-Layer 1-No Net" (solid, remove dead copper, pour order 39): 47.752,7.493 46.228,7.493 43.815,9.906 18.669,9.906 18.669,45.847 27.432,54.61 27.432,67.183 29.464,69.215 51.054,69.215 51.054,62.611 46.355,57.912 46.355,44.958 28.321,26.924 28.321,15.748 29.083,14.986 47.752,14.986
3V3 on Bottom Layer "Mid-Layer 1-No Net" (solid, remove dead copper, pour order 43): 74.041,44.069 74.168,45.212 69.85,45.212 68.199,43.561 68.199,41.148 66.04,41.148 63.627,38.862 63.627,38.1 58.42,38.1 58.42,35.306 55.245,35.306 55.245,50.038 58.547,50.038 58.547,53.34 55.372,53.34 55.372,55.499 54.483,56.388 52.832,56.388 52.832,56.261 52.07,55.499 52.07,48.641 29.591,26.162 29.591,20.193 54.864,20.193 54.864,24.384 68.834,38.227 73.914,38.227
3V3 on Bottom Layer "Mid-Layer 1-No Net" (solid, remove dead copper, pour order 47): 138.938,41.783 128.651,41.783 127.635,42.672 126.492,43.815 126.466,66.929 124.349,69.088 123.85,69.596 123.825,94.742 123.571,94.996 121.982,94.996 121.235,94.234 121.285,93.472 121.285,69.596 118.618,66.929 115.256,63.627 114.26,62.611 114.26,57.912 106.164,57.912 99.439,51.054 99.314,50.927 99.314,24.765 122.356,24.765 123.477,25.908 123.601,26.035 123.601,31.496 123.85,31.496 127.089,34.798 128.708,36.449 138.938,36.449
2V5 on Mid-Layer 1 "Mid-Layer 1-No Net" (solid, pour order 38): 139.827,9.906 139.827,15.621 138.811,15.621 106.426,48.006 106.324,50.114 104.369,51.943 97.511,51.943 94.996,48.006 94.996,28.321 95.123,28.194 99.898,24.816 120.066,24.892 135.001,9.906
5V on Mid-Layer 1 "Mid-Layer 1-No Net" (solid, remove dead copper, pour order 44): 44.45,77.724 43.434,78.74 43.434,79.121 41.529,79.121 39.243,76.835 39.243,71.501 38.354,70.612 35.941,70.612 33.782,72.771 30.988,72.771 30.226,72.009 30.226,70.485 32.385,68.326 35.179,68.326 41.91,61.595 46.355,61.595 46.863,62.103 46.863,75.438
2V5 on Mid-Layer 1 "Mid-Layer 1-No Net" (solid, remove dead copper, pour order 46): 88.265,48.006 88.265,48.133 70.993,65.405 56.388,65.405 55.118,64.008 55.118,60.833 57.404,60.833 58.039,61.468 59.944,63.627 67.564,63.627 76.2,54.991 76.2,48.133
5V on Mid-Layer 1 "Mid-Layer 1-No Net" (solid, remove dead copper, pour order 40): 45.339,11.303 51.435,11.303 51.562,11.43 51.562,7.493 45.339,7.493
2V5 on Mid-Layer 1 "Top Layer-No Net" (solid, remove dead copper, pour order 34): 76.2,48.133 76.2,28.194 96.52,28.194 96.266,28.448 96.266,48.133
5V on Mid-Layer 1 "Mid-Layer 1-No Net" (solid, remove dead copper, pour order 42): 139.573,89.535 146.304,89.535 146.304,54.61 132.334,40.767 128.905,40.767 123.825,45.847 123.825,65.405 139.7,81.28
5V on Mid-Layer 1 "Mid-Layer 1-No Net" (solid, remove dead copper, pour order 45): 46.482,75.565 50.673,75.565 56.642,81.534 56.642,90.805 62.484,96.647 146.431,96.647 146.431,86.487 123.825,45.847 111.506,58.166 82.423,58.166 80.772,59.817 74.676,66.04 45.72,66.04
GND on Ground Plane in NEGATIVE (split plane): 147.572,8.948 120.99,8.948 120.87,8.939 120.753,8.911 120.675,8.879 120.643,8.865 120.54,8.802 120.449,8.725 119.811,8.086 119.733,7.995 119.67,7.893 119.657,7.86 119.624,7.782 119.596,7.665 119.587,7.546 119.587,2.159 106.23,2.159 106.23,7.117 106.221,7.237 106.193,7.353 106.147,7.464 106.084,7.567 106.007,7.658 105.915,7.736 105.813,7.798 105.702,7.844 105.586,7.872 105.466,7.882 103.841,7.882 103.722,7.872 103.605,7.844 103.494,7.798 103.392,7.736 103.301,7.658 103.223,7.567 103.16,7.464 103.114,7.353 103.086,7.237 103.077,7.117 103.077,2.159 57.843,2.159 57.843,7.244 57.834,7.364 57.806,7.48 57.76,7.591 57.697,7.694 57.62,7.785 57.528,7.863 57.426,7.925 57.315,7.971 57.199,7.999 57.079,8.009 55.708,8.009 55.589,7.999 55.472,7.971 55.361,7.925 55.259,7.863 55.168,7.785 55.09,7.694 55.027,7.591 54.981,7.48 54.953,7.364 54.944,7.244 54.944,2.159 41.46,2.159 41.46,7.52 41.451,7.64 41.423,7.756 41.391,7.835 41.377,7.867 41.314,7.97 41.237,8.061 40.573,8.725 40.482,8.802 40.379,8.865 40.347,8.879 40.268,8.911 40.152,8.939 40.032,8.948 16.088,8.948 15.968,8.939 15.851,8.911 15.773,8.879 15.741,8.865 15.638,8.802 15.547,8.725 14.909,8.086 14.831,7.995 14.768,7.893 14.755,7.86 14.722,7.782 14.694,7.665 14.685,7.546 14.685,0.693 0.693,0.693 0.693,97.407 147.572,97.407

## Keep-outs
Keep-Out Layer:
  lines w0.203: 120.021,1.326 105.67,1.326 105.67,9.2 103.638,9.2 103.638,1.326 57.283,1.326 57.283,9.2 55.378,9.2 55.378,1.326 40.9,1.326 40.9,9.835 1.784,9.835 1.784,96.647 146.431,96.647 146.431,9.835 120.021,9.835 ; 120.148,1.326 120.148,9.835

## Other copper
Bottom Layer:
  pour cut-out: 110.137,53.885 110.353,54.102 116.332,54.102 116.332,52.248 117.145,51.435 120.142,51.435 120.777,50.8 120.777,49.149 118.999,49.149 117.094,47.244 110.871,47.244 109.855,48.26 109.601,48.006 108.331,48.006 108.331,51.308 108.966,51.943 110.109,51.943
Ground Plane in NEGATIVE (plane layer: these items are gaps in the copper):
  rectangle: 39.37,-1.143 121.031,2.159

## Silkscreen, mask and mechanical layers (free items; w line width, h text height)
Top Overlay:
  rectangle: 37.592,91.44 56.642,96.52
  text "2014 VKOREHOV" at 18.034,94.869 h0.81
  text "S/N" at 34.671,93.599 h0.81
  text "ASSY NO.: 201404" at 17.78,93.218 h0.81
Top Solder:
  rectangle: 40.513,-0.254 120.65,7.366
Bottom Solder:
  rectangle: 40.513,-0.254 120.65,7.366
Board Cut:
  lines w0.508: 40.138,8.438 40.95,7.626 40.95,0.564 41.331,0.183 55.073,0.183 55.454,0.564 55.454,7.499 57.333,7.499 57.333,0.564 57.714,0.183 103.206,0.183 103.587,0.564 103.587,7.372 105.72,7.372 105.72,0.564 106.101,0.183 119.716,0.183 120.097,0.564 120.097,7.651 120.828,8.382 148.082,8.382 148.082,97.917 0.183,97.917 0.183,0.183 15.195,0.183 15.195,7.651 15.982,8.438 40.163,8.438
Board Chamfer Spec:
  circle w0.254: c40.282,1.309 r2.54
  lines w0.203: 196.779,33.711 201.224,33.711 201.224,26.218 ; 199.319,21.011 209.479,21.011 ; 199.319,26.091 208.209,26.091 ; 201.224,13.391 201.224,20.884 ; 203.447,12.756 210.94,12.756 ; 205.352,52.126 213.162,52.126 ; 211.067,10.851 211.067,19.741 ; 211.702,10.851 211.702,19.741 ; 213.289,46.411 213.289,54.031 ; 213.924,27.361 220.909,52.761 ; 219.322,12.756 211.829,12.756 ; 227.76,48.191 220.421,50.863 ; 201.224,20.884 200.589,17.074 201.859,17.074 201.224,20.884 ; 201.224,26.218 200.589,30.028 201.859,30.028 201.224,26.218 ; 210.94,12.756 207.13,12.121 207.13,13.391 210.94,12.756 ; 211.829,12.756 215.639,12.121 215.639,13.391 211.829,12.756 ; 213.162,52.126 209.352,51.491 209.352,52.761 213.162,52.126 ; 220.421,50.863 223.784,48.963 224.218,50.156 220.421,50.863 ; 200.716,17.201 201.224,20.63 201.732,17.201 200.716,17.201 ; 200.716,29.901 201.224,26.472 201.732,29.901 200.716,29.901 ; 200.843,17.328 201.224,20.376 201.605,17.328 200.843,17.328 ; 200.843,29.774 201.224,26.726 201.605,29.774 200.843,29.774 ; 200.97,17.455 201.478,17.455 201.224,20.122 200.97,17.455 ; 200.97,29.647 201.224,26.98 201.478,29.647 200.97,29.647 ; 201.097,17.582 201.351,17.582 201.224,19.868 201.097,17.582 ; 201.097,29.52 201.224,27.234 201.351,29.52 201.097,29.52 ; 207.257,12.248 207.257,13.264 210.686,12.756 207.257,12.248 ; 207.384,12.375 207.384,13.137 210.432,12.756 207.384,12.375 ; 207.511,12.502 207.511,13.01 210.178,12.756 207.511,12.502 ; 207.638,12.629 209.924,12.756 207.638,12.883 207.638,12.629 ; 209.479,26.091 209.479,45.459 210.432,45.459 210.749,43.871 212.337,47.681 212.337,45.459 213.289,45.459 213.289,26.091 211.702,21.011 211.067,21.011 209.479,26.091 ; 209.479,51.618 209.479,52.634 212.908,52.126 209.479,51.618 ; 209.606,51.745 209.606,52.507 212.654,52.126 209.606,51.745 ; 209.733,51.872 212.4,52.126 209.733,52.38 209.733,51.872 ; 209.86,51.999 212.146,52.126 209.86,52.253 209.86,51.999 ; 212.083,12.756 215.512,12.248 215.512,13.264 212.083,12.756 ; 212.337,12.756 215.385,12.375 215.385,13.137 212.337,12.756 ; 212.591,12.756 215.258,12.502 215.258,13.01 212.591,12.756 ; 212.845,12.756 215.131,12.629 215.131,12.883 212.845,12.756 ; 220.659,50.776 223.708,49.126 224.055,50.08 220.659,50.776 ; 220.898,50.689 223.632,49.288 223.893,50.004 220.898,50.689 ; 221.137,50.602 223.556,49.451 223.73,49.929 221.137,50.602 ; 221.376,50.515 223.48,49.614 223.567,49.853 221.376,50.515
  lines w0.254: 36.675,-0.037 36.675,1.36 37.183,0.09 36.675,-0.037 ; 36.68,1.356 36.709,2.723 37.226,2.642 36.68,1.356
  text "DETAIL A" at 201.859,59.111 h0.81
  text "o" at 219.004,53.079 h0.81
  text "20" at 214.877,50.539 h0.81
  text "0.071" at 187.572,32.441 h0.81
  text "+.010" at 187.889,28.631 h0.81
  text "-.015" at 187.889,24.821 h0.81
  text "0.010" at 220.909,11.486 h0.81
  text "+.005" at 220.909,7.676 h0.81
  text "-.010" at 220.909,3.866 h0.81

## Text inside footprints (layer, text, board x,y; h text height)
JTAG: Top Overlay "10" at 65.837,61.341 h1.27; Top Overlay "9" at 65.938,58.801 h1.27; Top Overlay "1" at 51.435,58.852 h1.27; Top Overlay "2" at 51.181,61.341 h1.27